# Altium PCB mcb.PcbDoc (part 2 of 2)
Units mm, origin at the board's own origin, x right, y up, seen from the top; angles counter-clockwise.
Board outline 144 x 86 mm, 4 copper layers (Top Layer, GND Plane, PWR Plane, Bottom Layer), stack 1.537 mm thick; 157 components, 137 nets, 622 pads, 241 vias.
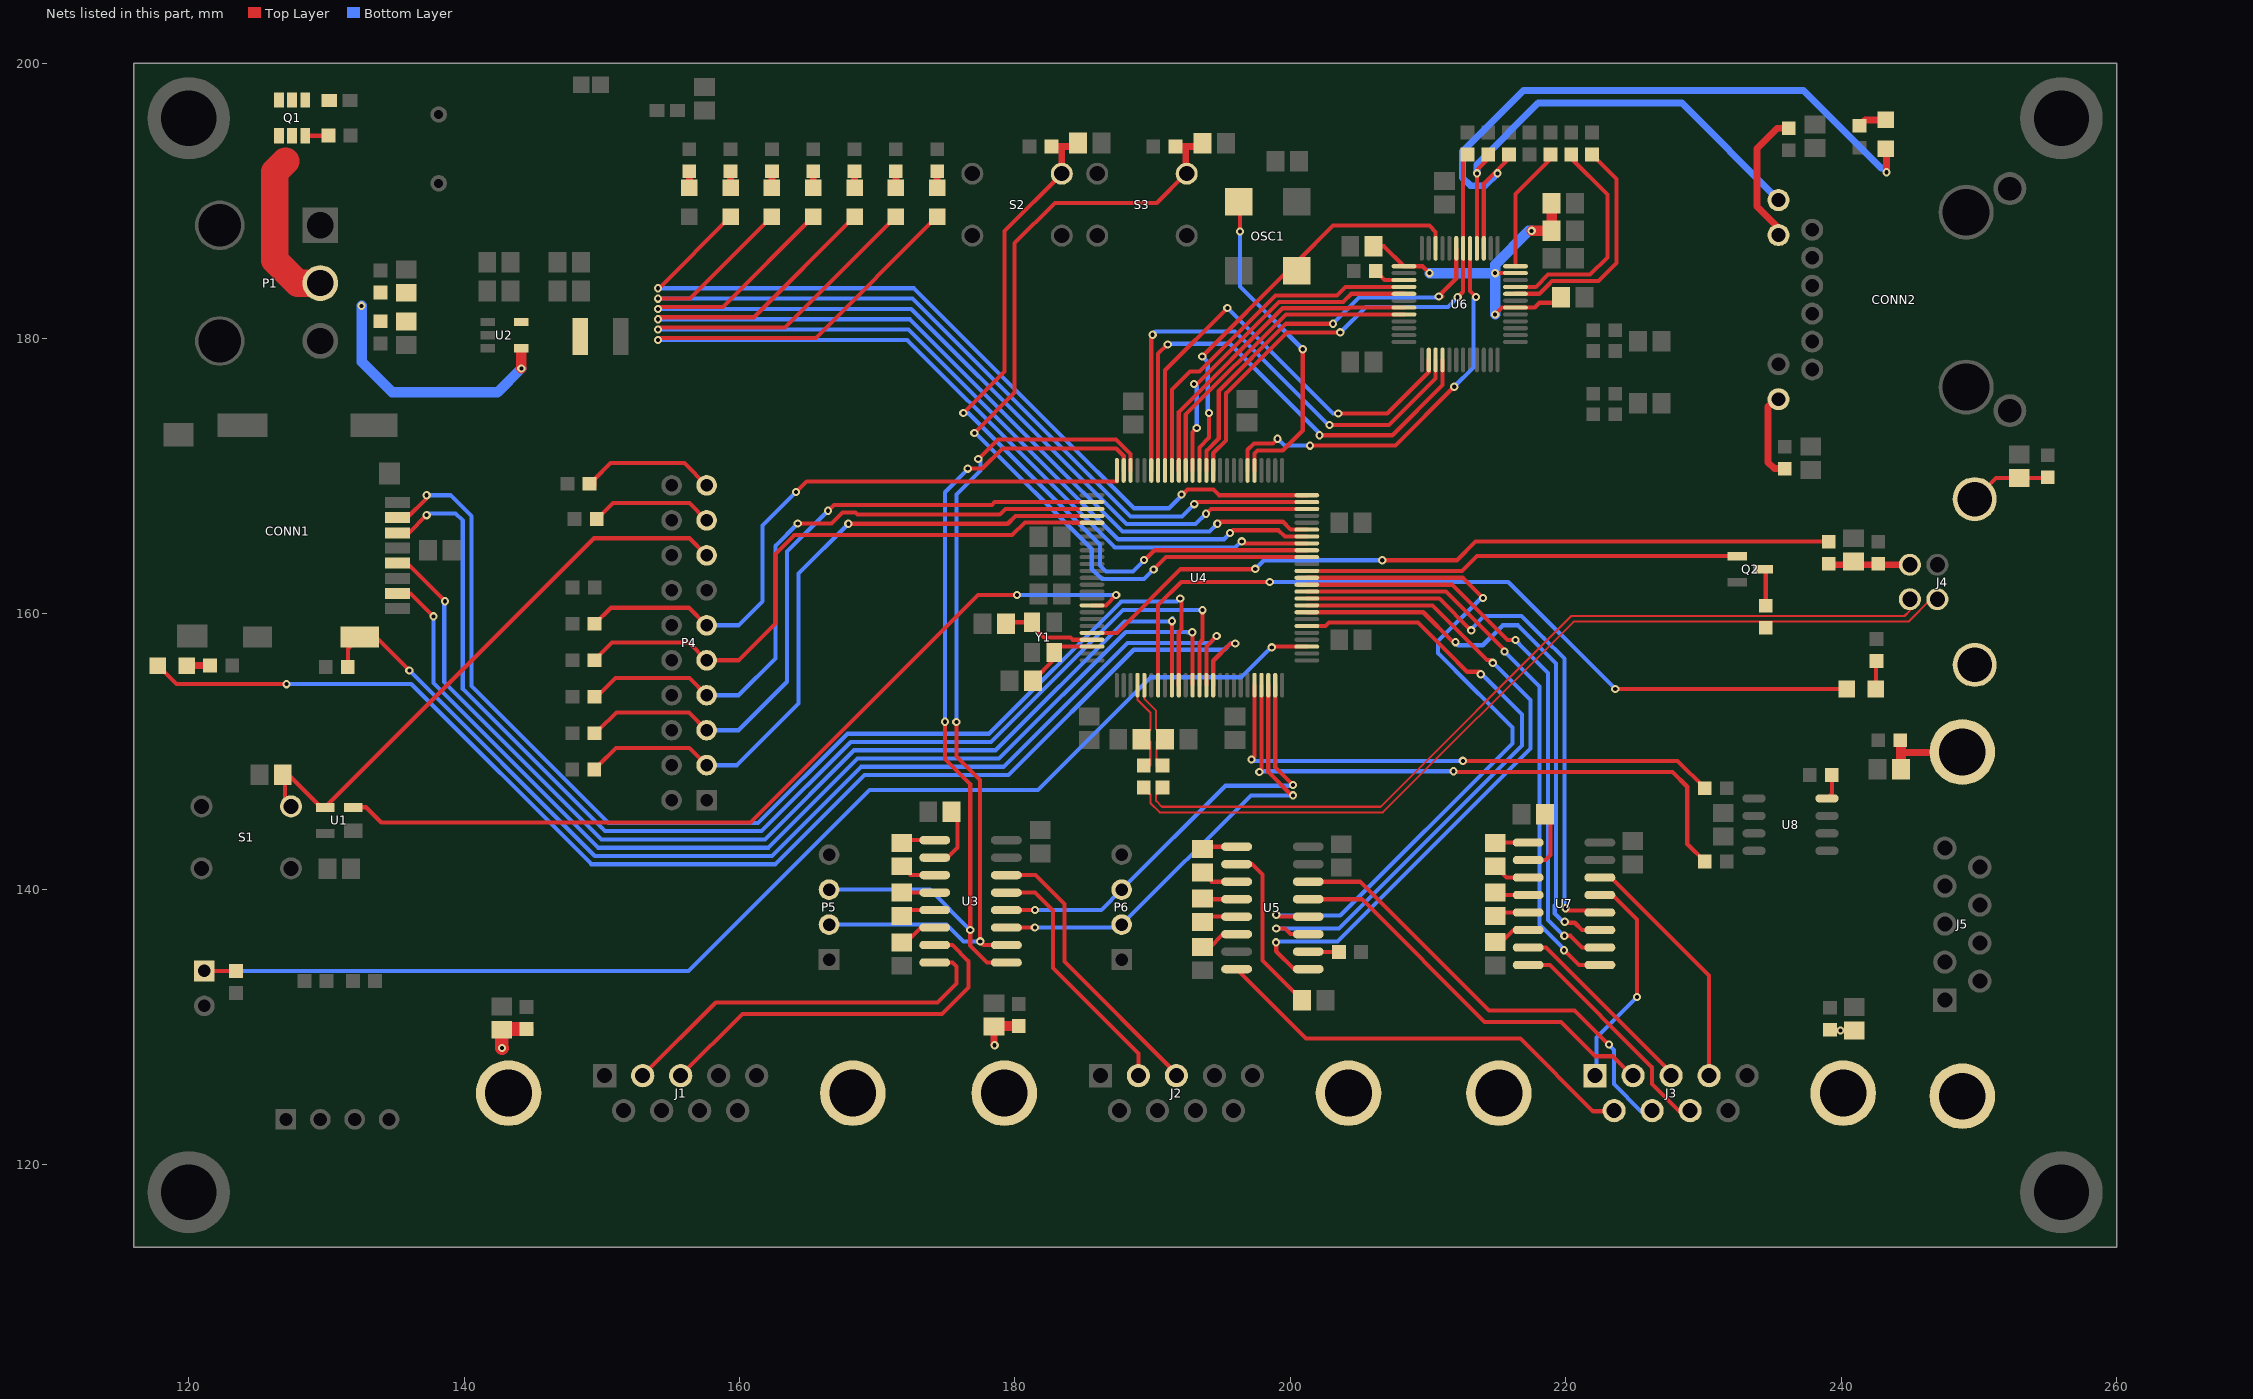
[diagram p4: the nets of this part, all layers, seen from the top]

## Via types
v1: diameter 0.6, hole 0.3, Top Layer to Bottom Layer, 146 vias
v2: diameter 0.6, hole 0.3, Top Layer to Bottom Layer, tented top, 95 vias

## Nets (pads, with @x,y where several pads share a name; then routed paths per layer and width w, separated by ;. In a path a pad name is that pad's centre, name@x,y a point inside that pad or via, vN(x,y) a via of type N, cw(c..) or ccw(c..) an arc to the next point about the centre after c; other vN are vias at no path point) (continued)
JTAG1: P4.5 R11.1 U4.2 | length 49.6
  Top Layer w0.3: R11.1@149.46,151.565 149.765,151.565 151.05,152.85 156.315,152.85 P4.5@157.61,151.555 ; v1(166.419,167.494) 166.85,167.925 178.325,167.925 178.525,168.125 U4.2@185.6,168.125
  Bottom Layer w0.3: P4.5@157.61,151.555 159.93,151.555 163.45,155.075 163.45,164.525 v1(166.419,167.494)
JTAG2: P4.7 R12.1 U4.3 | length 47.7
  Top Layer w0.3: R12.1@149.46,154.105 149.755,154.105 151,155.35 156.355,155.35 P4.7@157.61,154.095 ; v1(164.225,166.575) 166.675,166.575 167.475,167.375 168.425,167.375 168.575,167.225 178.9,167.225 179.3,167.625 U4.3@185.6,167.625
  Bottom Layer w0.3: P4.7@157.61,154.095 159.93,154.095 162.6,156.765 162.6,164.95 v1(164.225,166.575)
JTAG3: P4.3 R10.1 U4.4 | length 50.2
  Top Layer w0.3: R10.1@149.46,149.025 149.775,149.025 151.025,150.275 156.35,150.275 P4.3@157.61,149.015 ; v1(167.9,166.55) 179.475,166.55 180.05,167.125 U4.4@185.6,167.125
  Bottom Layer w0.3: P4.3@157.61,149.015 159.815,149.015 164.285,153.485 164.285,162.935 v1(167.9,166.55)
JTAG4: P4.9 R13.1 U4.5 | length 44.3
  Top Layer w0.3: R13.1@149.46,156.645 150.74,157.925 156.32,157.925 P4.9@157.61,156.635 159.93,156.635 162.6,159.305 162.6,164.35 163.975,165.725 179.8,165.725 180.725,166.65 184.174,166.65 184.199,166.625 U4.5@185.6,166.625
JTAG5: P4.11 R14.2 U4.100 | length 47.4
  Top Layer w0.3: R14.2@149.46,159.185 149.46,159.26 150.65,160.45 156.335,160.45 P4.11@157.61,159.175 ; v1(164.1,168.85) 164.875,169.625 187.4,169.625 U4.100@187.4,170.425
  Bottom Layer w0.3: P4.11@157.61,159.175 159.93,159.175 161.675,160.92 161.675,166.425 v1(164.1,168.85)
L\I\N\K\_\L\E\D\: CONN2.7 R34.1 U6.28 | length 34.3
  Top Layer w0.3: U6.28@213.55,186.55 213.55,192.25 214.375,193.075 R34.1@214.375,193.375
  Bottom Layer w0.5: v1(213.55,192) 213.55,192.65 218,197.1 228.43,197.1 CONN2.7@235.35,190.18
NetC1_2: C1.2 P4.15 S1.3 U1.3 | length 42.1
  Top Layer w0.3: C1.2@126.825,148.325 127.225,148.325 129.59,145.96 U1.3@129.9,145.96 149.44,165.5 156.365,165.5 P4.15@157.61,164.255 ; S1.3@126.975,146.025 C1.2@126.975,147.775
NetC5_2: C5.2 C6.1 R7.2 R8.1 U2.4 | length 18.7
  Top Layer w0.75: v1(144.15,177.825) U2.4@144.15,179.2
  Bottom Layer w0.75: v2(132.55,182.375) 132.55,178.325 134.775,176.1 142.425,176.1 v1(144.15,177.825)
NetC9_1: C9.1 J1.10 J1.11 R9.2 | length 3.1
  Top Layer w1: C9.1@142.727,129.802 142.727,128.492 142.744,128.475 v1(142.75,128.475) ; C9.1@142.777,129.852 R9.2@144.527,129.852
NetC13_2: C13.2 U3.6 | length 2.8
  Top Layer w0.3: C13.2@171.773,136.152 172.102,136.152 173.172,137.222 U3.6@174.173,137.222
NetC14_1: C14.1 U3.5 | length 2.6
  Top Layer w0.3: C14.1@171.773,138.077 172.188,138.492 U3.5@174.173,138.492
NetC14_2: C14.2 U3.4 | length 2.4
  Top Layer w0.3: C14.2@171.773,139.777 171.788,139.762 U3.4@174.173,139.762
NetC15_1: C15.1 U3.3 | length 2.7
  Top Layer w0.3: C15.1@171.773,141.677 172.418,141.032 U3.3@174.173,141.032
NetC15_2: C15.2 U3.1 | length 2.2
  Top Layer w0.3: C15.2@171.968,143.572 U3.1@174.173,143.572
NetC16_2: C16.2 U3.2 | length 4
  Top Layer w0.3: U3.2@174.173,142.302 175.102,142.302 175.825,143.025 C16.2@175.825,145.025
NetC17_1: C17.1 U4.22 Y1.1 | length 6.7
  Top Layer w0.3: C17.1@179.35,159.4 Y1.1@181.25,159.4 ; Y1.1@181.25,159.175 182.125,158.3 184.025,158.3 184.2,158.125 U4.22@185.6,158.125
NetC21_1: C21.1 J2.10 J2.11 R26.2 | length 3.1
  Top Layer w0.5: v1@178.475,128.725 C21.1@178.475,130.025
  Top Layer w0.75: C21.1@178.525,130.075 R26.2@180.275,130.075
  other v1: 178.525,128.675
NetC22_1: C22.1 U4.23 Y1.2 | length 5
  Top Layer w0.3: C22.1@181.3,155.15 182.85,156.7 Y1.2@182.85,157.2 ; Y1.2@183.275,157.625 U4.23@185.6,157.625
NetC25_2: C25.2 R25.1 S2.3 U4.67 | length 55.9
  Top Layer w0.3: v1(176.25,174.6) 179.25,177.6 179.25,187.8 183.4,191.95 183.4,191.75 S2.3@183.1,191.45 ; v2(189.375,163.925) 189.425,163.925 190.125,164.625 U4.67@201.2,164.625
  Top Layer w0.5: R25.1@182.65,193.95 C25.2@184.15,193.95 ; S2.3@183.4,191.95 183.4,193.95 ; C25.2@184.4,194.2 C25.2@184.575,194.2
  Bottom Layer w0.3: v1(176.25,174.6) 176.25,174.575 176.625,174.575 186.175,165.025 186.175,163.525 186.625,163.075 188.575,163.075 189.375,163.875 v2(189.375,163.925)
NetC29_2: C29.2 U5.6 | length 2.9
  Top Layer w0.3: C29.2@193.625,135.825 194.2,135.825 195.05,136.675 196.03,136.675 U5.6@196.1,136.745
NetC30_1: C30.1 U5.5 | length 2.1
  Top Layer w0.3: C30.1@194.015,138.015 U5.5@196.1,138.015
NetC30_2: C30.2 U5.4 | length 2.4
  Top Layer w0.3: C30.2@193.665,139.285 U5.4@196.1,139.285
NetC31_1: C31.1 U5.3 | length 2.8
  Top Layer w0.3: C31.1@193.625,141.225 194.295,140.555 U5.3@196.1,140.555
NetC31_2: C31.2 U5.1 | length 2.3
  Top Layer w0.3: C31.2@193.795,143.095 U5.1@196.1,143.095
NetC32_2: C32.2 R29.1 S3.3 U4.66 | length 63.9
  Top Layer w0.3: v1(177.05,173.15) 179.975,176.075 179.975,186.925 182.9,189.85 190.3,189.85 S3.3@192.4,191.95 ; v2(190.072,163.228) 190.969,164.125 U4.66@201.2,164.125
  Top Layer w0.5: R29.1@191.65,193.95 192.4,193.95 ; S3.3@192.4,191.95 192.4,193.95 ; C32.2@193.4,193.95 C32.2@193.15,193.95 ; C32.2@193.625,194.175 193.375,194.175 C32.2@193.15,193.95 ; 192.4,193.95 C32.2@193.15,193.95
  Bottom Layer w0.3: v1(177.05,173.15) 177.15,173.15 185.575,164.725 185.575,163.276 186.326,162.525 189.369,162.525 v2(190.072,163.228)
NetC36_2: C36.2 U5.2 | length 12.5
  Top Layer w0.3: U5.2@196.1,141.825 197.225,141.825 197.975,141.075 197.975,134.825 C36.2@200.85,131.95
NetC41_2: C41.2 C48.2 C49.2 C50.2 U6.18 U6.23 U6.37 | length 26.6
  Top Layer w0.3: C41.2@206.05,186.7 206.8,186.7 U6.37@208.25,185.25 209.61,185.25 v2(210.11,184.75) ; v2(214.875,181.75) 215.375,182.25 U6.18@216.35,182.25 217.75,182.25 218.1,182.6 C50.2@219.25,182.6 ; v2(214.875,184.75) U6.23@216.35,184.75
  Top Layer w0.75: v1(217.525,187.825) C48.2@218.975,187.825 C49.2@218.975,189.825
  Bottom Layer w0.75: v2(210.11,184.75) v2(214.875,184.75) ; v2(214.875,181.75) v2(214.875,184.75) ; v1(217.525,187.825) 217.325,187.825 214.875,185.375 v2(214.875,184.75)
NetC43_2: C43.2 U7.6 | length 2.8
  Top Layer w0.3: C43.2@214.875,136.175 215.35,136.175 216.22,137.045 U7.6@217.275,137.045
NetC44_1: C44.1 U7.5 | length 2.2
  Top Layer w0.3: C44.1@215.115,138.315 U7.5@217.275,138.315
NetC44_2: C44.2 U7.4 | length 2.2
  Top Layer w0.3: C44.2@215.065,139.585 U7.4@217.275,139.585
NetC45_1: C45.1 U7.3 | length 2.7
  Top Layer w0.3: C45.1@214.875,141.675 215.695,140.855 U7.3@217.275,140.855
NetC45_2: C45.2 U7.1 | length 2.4
  Top Layer w0.3: C45.2@214.895,143.395 U7.1@217.275,143.395
NetC46_2: C46.2 U7.2 | length 4.7
  Top Layer w0.3: U7.2@217.275,142.125 218.525,142.125 218.9,142.5 218.9,144.9 C46.2@218.5,145.3
NetC57_1: C57.1 J3.10 J3.11 R49.2 | length 1.7
  Top Layer w0.3: R49.2@239.25,129.75 C57.1@240.95,129.75
  other v2: 239.95,129.75
NetC58_1: C58.1 J4.1 R50.2 R54.2 | length 5.8
  Top Layer w0.5: R50.2@239.18,163.57 J4.1@244.99,163.57
NetC59_1: C59.1 J5.10 J5.11 R51.2 | length 6.7
  Top Layer w0.5: 244.35,149.932 J5.11@248.757,149.932
  Top Layer w0.75: C59.1@244.35,148.475 C59.1@244.35,148.725 244.35,149.932 R51.2@244.35,150.775
NetC60_1: C60.1 J4.5 J4.6 R55.2 | length 6
  Top Layer w0.3: J4.6@249.7,168.34 251.235,169.875 C60.1@252.925,169.875 254.95,169.875 R55.2@255,169.925
NetCONN1_2: CONN1.2 U4.35 | length 87.8
  Top Layer w0.3: CONN1.2@135.15,166.99 135.865,166.99 137.275,168.4 v1(137.275,168.625) ; U4.35@191.9,154.825 191.9,158.7 192.1,158.9 v2@192.1,161.025
  Bottom Layer w0.3: v1(137.275,168.625) 139,168.625 140.525,167.1 140.525,154.775 150.475,144.825 161.351,144.825 167.826,151.3 178.124,151.3 187.724,160.9 191.775,160.9 v2(192,161.125)
NetCONN1_3: CONN1.3 U4.38 | length 88
  Top Layer w0.3: CONN1.3@135.15,165.89 135.99,165.89 v1(137.275,167.175) ; U4.38@193.4,154.825 193.4,157.9 193.625,158.125 v2(193.625,160.275)
  Bottom Layer w0.3: v1(137.275,167.175) 137.4,167.3 139.375,167.3 139.9,166.775 139.9,154.551 150.226,144.225 161.6,144.225 168.075,150.7 178.25,150.7 180.101,152.551 187.85,160.3 193.6,160.3 v2(193.625,160.275)
NetCONN1_5: CONN1.5 U4.34 | length 79.4
  Top Layer w0.3: CONN1.5@135.15,163.69 135.835,163.69 v1(138.6,160.925) ; U4.34@191.4,154.825 v2(191.4,159.475)
  Bottom Layer w0.3: v1(138.6,160.925) 138.55,160.875 138.55,155.053 149.978,143.625 161.849,143.625 168.324,150.1 178.597,150.1 187.947,159.45 191.192,159.45 v2@191.442,159.7
NetCONN1_7: CONN1.7 U4.37 | length 78.5
  Top Layer w0.3: CONN1.7@135.15,161.49 136.11,161.49 v1(137.775,159.825) ; U4.37@192.9,154.825 v2@192.9,158.644
  Bottom Layer w0.3: v1(137.775,159.825) 137.775,154.979 149.729,143.025 162.097,143.025 168.572,149.5 178.846,149.5 188.046,158.7 192.49,158.7 192.518,158.672 v2(192.872,158.672)
NetCONN1_9: CONN1.9 R4.1 U4.39 | length 83
  Top Layer w0.3: R4.1@131.55,156.15 131.55,157.475 CONN1.9@132.4,158.325 131.85,158.325 133.581,158.325 v1(136.018,155.887) ; U4.39@193.9,154.825 193.9,157.65 v2(194.65,158.4)
  Bottom Layer w0.3: v1(136.018,155.887) 149.481,142.425 162.346,142.425 168.821,148.9 179.175,148.9 188.175,157.9 194.15,157.9 v2(194.65,158.4)
NetCONN2_8: CONN2.8 R48.1 | length 9.7
  Top Layer w0.5: CONN2.8@235.35,187.64 235.35,188.15 233.9,189.6 233.9,193.8 235.375,195.275 R48.1@236.2,195.275
NetCONN2_10: CONN2.10 R46.1 | length 6.4
  Top Layer w0.5: CONN2.10@235.35,175.72 234.7,175.07 234.7,171 235.15,170.55 R46.1@235.9,170.55
NetD1_1: D1.1 R1.1 | length 1.7
  Top Layer w0.5: D1.1@119.85,156.25 R1.1@121.55,156.25
NetD1_2: D1.2 U4.40 | length 94.8
  Top Layer w0.3: D1.2@117.75,156.25 119.1,154.9 v1(127.1,154.9) ; U4.40@194.4,154.825 194.4,156.1 194.4,156.6 195.65,157.85 v2(196,157.85)
  Bottom Layer w0.3: v1(127.1,154.9) 136.157,154.9 149.232,141.825 162.594,141.825 169.069,148.3 179.525,148.3 188.625,157.4 193.925,157.4 195.2,157.4 195.65,157.85 v2(196,157.85)
NetD2_1: D2.1 R18.1 | length 1.2
  Top Layer w0.5: D2.1@156.35,190.95 R18.1@156.35,192.15
NetD3_1: D3.1 R19.1 | length 1.2
  Top Layer w0.5: D3.1@159.35,190.95 R19.1@159.35,192.15
NetD3_2: D3.2 U4.75 | length 61.9
  Top Layer w0.3: v1(154.075,183.65) 154.15,183.65 D3.2@159.35,188.85 ; v2@192.3,168.8 192.525,169.025 194.428,169.025 194.828,168.625 U4.75@201.2,168.625
  Bottom Layer w0.3: v1(154.075,183.65) 172.668,183.65 183.246,173.071 188.643,167.675 191.175,167.675 v2@192.3,168.8
  other v2: 192.1,168.675
NetD4_1: D4.1 R20.1 | length 1.2
  Top Layer w0.5: D4.1@162.35,190.95 R20.1@162.35,192.15
NetD4_2: D4.2 U4.74 | length 64.9
  Top Layer w0.3: v1(154.075,182.9) 156.4,182.9 D4.2@162.35,188.85 ; v2(193.025,167.975) v2@193.025,168.025 ; v2@193.188,168.125 194.325,168.125 U4.74@201.2,168.125
  Bottom Layer w0.3: v1(154.075,182.9) 172.569,182.9 182.822,172.647 188.394,167.075 192.125,167.075 192.919,167.869 192.919,168.075 192.925,168.075 v2(193.025,167.975)
NetD5_1: D5.1 R21.1 | length 1.2
  Top Layer w0.5: D5.1@165.35,190.95 R21.1@165.35,192.15
NetD5_2: D5.2 U4.73 | length 68.1
  Top Layer w0.3: v1(154.075,182.15) 154.225,182.3 158.8,182.3 D5.2@165.35,188.85 ; v2(193.875,167.275) 194.225,167.625 U4.73@201.2,167.625
  Bottom Layer w0.3: v1(154.075,182.15) 172.471,182.15 182.398,172.223 188.096,166.525 193.125,166.525 v2(193.875,167.275)
NetD6_1: D6.1 R22.1 | length 1.2
  Top Layer w0.5: D6.1@168.35,190.95 R22.1@168.35,192.15
NetD6_2: D6.2 U4.70 | length 71.2
  Top Layer w0.3: v1(154.075,181.4) 154.225,181.55 161.05,181.55 D6.2@168.35,188.85 ; v2@194.825,166.7 199.45,166.7 200.025,166.125 U4.70@201.2,166.125
  Bottom Layer w0.3: v1(154.075,181.4) 172.372,181.4 181.974,171.799 187.797,165.975 194.125,165.975 v2(194.7,166.55)
NetD7_1: D7.1 R23.1 | length 1.2
  Top Layer w0.5: D7.1@171.35,190.95 R23.1@171.35,192.15
NetD7_2: D7.2 U4.69 | length 74.6
  Top Layer w0.3: v1(154.075,180.65) 154.225,180.8 163.3,180.8 D7.2@171.35,188.85 ; v2(195.625,165.875) 195.825,166.075 199.15,166.075 199.6,165.625 U4.69@201.2,165.625
  Bottom Layer w0.3: v1(154.075,180.65) 172.274,180.65 181.549,171.374 187.499,165.425 195.175,165.425 v2(195.625,165.875)
NetD8_1: D8.1 R24.1 | length 1.2
  Top Layer w0.5: D8.1@174.35,190.95 R24.1@174.35,192.15
NetD8_2: D8.2 U4.68 | length 77.7
  Top Layer w0.3: v1(154.075,179.9) 154.225,180.05 165.55,180.05 D8.2@174.35,188.85 ; U4.68@201.2,165.125 198.9,165.125 196.667,165.125 v2(196.475,165.275) ; v2(196.475,165.275) 196.475,165.308 v2(196.475,165.275)
  Bottom Layer w0.3: v1(154.075,179.9) 172.175,179.9 181.125,170.95 187.25,164.825 195.992,164.825 196.442,165.275 v2(196.475,165.275)
NetD9_1: D9.1 R53.1 | length 2
  Top Layer w0.3: D9.1@242.525,154.55 R53.1@242.525,156.525
NetD9_2: D9.2 U4.32 | length 59.8
  Top Layer w0.3: U4.32@190.4,154.825 190.4,160.65 192.075,162.325 v2(198.5,162.325) ; v2(223.6,154.55) D9.2@240.425,154.55
  Bottom Layer w0.3: v2(198.5,162.325) 215.825,162.325 v2(223.6,154.55)
NetD10_1: D10.1 R52.1 | length 2.1
  Top Layer w0.5: R52.1@241.325,195.45 241.75,195.875 D10.1@243.25,195.875
NetD10_2: D10.2 R33.1 U6.27 | length 49.7
  Top Layer w0.3: U6.27@214.05,186.55 214.05,191.25 215.875,193.075 R33.1@215.875,193.375
  Top Layer w0.5: D10.2@243.25,193.775 243.3,193.725 v1(243.3,192.075)
  Bottom Layer w0.5: v1(215.05,192) 214.15,191.1 213.075,191.1 212.5,191.675 212.5,193.6 216.925,198.025 237.275,198.025 242.9,192.4 243.3,192.4 v1(243.3,192.075)
NetJ1_2: J1.2 U3.8 | length 28.5
  Top Layer w0.3: J1.2@152.965,126.47 158.27,131.775 174.375,131.775 175.75,133.15 175.75,134.39 175.458,134.682 U3.8@174.173,134.682
NetJ1_3: J1.3 U3.7 | length 27.4
  Top Layer w0.3: J1.3@155.725,126.47 160.205,130.95 174.7,130.95 176.625,132.875 176.625,134.775 175.45,135.95 U3.7@175.175,135.95
NetJ2_2: J2.2 U3.13 | length 18.5
  Top Layer w0.3: U3.13@179.373,139.762 181.463,139.762 182.775,138.45 182.775,134.275 188.965,128.085 J2.2@188.965,126.445
NetJ2_3: J2.3 U3.14 | length 20.9
  Top Layer w0.3: U3.14@179.373,141.032 181.493,141.032 183.589,138.936 183.589,134.761 J2.3@191.815,126.535
NetJ3_1: J3.1 U7.13 | length 16
  Top Layer w0.3: U7.13@222.475,139.585 223.39,139.585 225.175,137.8 v1(225.175,132.175)
  Bottom Layer w0.3: J3.1@222.235,126.42 222.235,129.235 v1(225.175,132.175)
NetJ3_2: J3.2 U5.13 | length 28.9
  Top Layer w0.3: U5.13@201.3,139.285 205.19,139.285 214.1,130.375 219.65,130.375 222.15,127.875 223.435,127.875 J3.2@224.89,126.42
NetJ3_3: J3.3 U7.7 | length 14.3
  Top Layer w0.3: U7.7@217.275,135.775 218.561,135.775 J3.3@227.783,126.553
NetJ3_4: J3.4 U7.14 | length 17.4
  Top Layer w0.3: U7.14@223.295,140.855 230.41,133.74 J3.4@230.41,126.42
NetJ3_6: J3.6 U5.8 | length 31.7
  Top Layer w0.3: U5.8@196.1,134.205 201.13,129.175 216.7,129.175 221.995,123.88 J3.6@223.51,123.88
NetJ3_7: J3.7 U5.14 | length 32.7
  Top Layer w0.3: U5.14@201.3,140.555 205.07,140.555 214.425,131.2 220.625,131.2 223.1,128.725 v1(223.15,128.725)
  Bottom Layer w0.3: v1(223.15,128.725) 223.15,128.675 223.5,128.325 223.5,125.85 225.47,123.88 J3.7@225.595,123.88
NetJ3_8: J3.8 U7.8 | length 16.1
  Top Layer w0.3: U7.8@217.275,134.505 218.845,134.505 226.275,127.075 226.275,125.875 J3.8@228.27,123.88
NetL1_1: L1.1 Q1.4
NetL2_1: L2.1 U2.5
NetOSC1_1: OSC1.1 U4.80 | length 23.5
  Top Layer w0.3: v2(196.35,187.775) OSC1.1@196.35,189.475 ; U4.80@197.4,170.425 197.4,171.664 197.611,171.875 199.45,171.875 200.9,173.325 v1(200.9,179.225)
  Bottom Layer w0.3: v2(196.35,187.775) 196.35,183.775 v1(200.9,179.225)
NetP1_2: P1.2 Q1.1 Q1.2 Q1.5 Q1.6 | length 11.5
  Top Layer w2: 127.025,192.875 126.25,192.1 126.25,185.675 127.9,184.025 P1.2@129.55,184.025
NetP2_1: P2.1 R2.1 U4.53 | length 92.1
  Top Layer w0.3: P2.1@121.125,134.075 R2.1@123.425,134.075 ; v2@198.65,157.625 U4.53@201.2,157.625
  Bottom Layer w0.3: P2.1@121.125,134.075 156.3,134.075 169.45,147.225 170.3,147.225 181.675,147.225 189.85,155.4 196.425,155.4 198.6,157.575 v2(198.65,157.575)
NetP4_17: P4.17 R16.2 | length 9.2
  Top Layer w0.3: R16.2@149.46,166.8 149.55,166.8 150.8,168.05 156.355,168.05 P4.17@157.61,166.795
NetP4_19: P4.19 R17.2 | length 9.8
  Top Layer w0.3: R17.2@149.46,169.325 149.46,169.785 150.625,170.95 155.995,170.95 P4.19@157.61,169.335
NetQ1_3: Q1.3 R5.2 | length 1.7
  Top Layer w0.3: Q1.3@128.45,194.725 130.125,194.725 R5.2@130.15,194.75
NetQ2_1: Q2.1 R45.2 | length 2.5
  Top Layer w0.3: R45.2@234.525,160.6 Q2.1@234.525,163.075
NetQ2_2: Q2.2 U4.64 | length 31.7
  Top Layer w0.3: U4.64@201.2,163.125 212.475,163.125 213.55,164.2 Q2.2@232.45,164.2
NetR30_1: R30.1 U5.10 | length 2.2
  Top Layer w0.3: U5.10@201.325,135.45 R30.1@203.525,135.45
NetR31_1: R31.1 U6.39 | length 2.3
  Top Layer w0.3: R31.1@206.2,184.9 206.85,184.25 U6.39@208.25,184.25
NetR40_2: R40.2 U6.24 | length 9.2
  Top Layer w0.3: U6.24@216.35,185.25 216.35,190.5 218.9,193.05 R40.2@218.9,193.375
NetR41_1: R41.1 U6.21 | length 16.1
  Top Layer w0.3: U6.21@216.35,183.75 217.825,183.75 218.725,184.65 221.775,184.65 223.025,185.9 223.025,190.45 220.4,193.075 R41.1@220.4,193.375
NetR42_1: R42.1 U6.20 | length 16.9
  Top Layer w0.3: U6.20@216.35,183.25 218.076,183.25 218.7,183.874 219.001,184.175 222.375,184.175 223.7,185.5 223.7,191.575 R42.1@221.9,193.375
NetR43_2: R43.2 U4.47 | length 43.9
  Top Layer w0.3: v1(197.75,148.525) 197.9,148.675 U4.47@197.9,154.825 ; v1@211.825,148.625 211.825,148.6 v1(211.85,148.575) ; v1@211.85,148.525 227.75,148.525 228.825,147.45 228.825,143.3 R43.2@230.1,142.025
  Bottom Layer w0.3: v1(197.75,148.525) 197.8,148.575 v1(211.85,148.575)
NetR44_2: R44.2 U4.46 | length 39.4
  Top Layer w0.3: v1@197.2,149.4 v1(197.175,149.425) 197.4,149.65 U4.46@197.4,154.825 ; v1(212.53,149.33) 212.636,149.225 212.736,149.325 228.125,149.325 R44.2@230.1,147.35
  Bottom Layer w0.3: v1(197.175,149.425) v1@197.275,149.325 ; v1@197.305,149.33 v1(212.53,149.33)
NetR47_2: R47.2 U8.8 | length 1.8
  Top Layer w0.3: U8.8@238.975,146.605 239.325,146.955 R47.2@239.325,148.3
NetR50_1: R50.1 U4.21 | length 56.2
  Top Layer w0.3: U4.21@185.6,158.625 187.4,158.625 192.025,163.25 197.425,163.25 v2(197.45,163.275) ; v1(206.675,163.9) 212.1,163.9 213.45,165.25 R50.1@239.1,165.25
  Bottom Layer w0.3: v2(197.45,163.275) 198.075,163.9 v1(206.675,163.9)
NetU1_2: U1.2 U4.17 | length 64.8
  Top Layer w0.3: U1.2@131.95,145.96 132.865,145.96 133.975,144.85 160.8,144.85 177.325,161.375 v1(180.15,161.375) ; U4.17@185.6,160.625 186.6,160.625 v2(187.35,161.375)
  Bottom Layer w0.3: v1(180.15,161.375) v2(187.35,161.375)
NetU4_81: U4.81 U6.29 | length 29.8
  Top Layer w0.3: U4.81@196.9,170.425 196.9,171.925 197.35,172.375 198.725,172.375 v1(199.075,172.725) ; v1(201.425,172.225) 207.625,172.225 v1(211.9,176.5) ; U6.29@213.05,186.55 213.05,183.45 v2(213.475,183.025)
  Bottom Layer w0.3: v1(199.075,172.725) 199.575,172.225 v1(201.425,172.225) ; v1(211.9,176.5) 213.3,177.9 213.3,183 213.325,183.025 v2(213.475,183.025)
PHY_CRS_DV: U4.92 U6.40 | length 25.8
  Top Layer w0.3: U4.92@191.4,170.425 191.4,176.3 192.7,177.6 193.4,177.6 198.925,183.125 203.375,183.125 204,183.75 U6.40@208.25,183.75
PHY_MDC: U4.87 U6.31 | length 29.4
  Top Layer w0.3: U4.87@193.9,170.425 193.9,171.85 194.8,172.75 194.8,176.2 199.68,181.08 v1(203.095,181.08) ; v2(210.775,183.05) 211.05,183.05 210.887,183.212 212.05,184.375 U6.31@212.05,186.55
  Bottom Layer w0.3: v1(203.095,181.08) 204.995,182.981 210.844,182.981 v2(210.775,183.05)
PHY_MDIO: R32.1 U4.86 U6.30 | length 36.1
  Top Layer w0.3: U4.86@194.4,170.425 194.4,171.675 195.325,172.6 195.325,176.025 199.75,180.45 v1(203.625,180.45) v1@203.595,180.48 ; v2(212.15,183) 212.55,183.4 U6.30@212.55,186.55 R32.1@212.55,193.05
  Bottom Layer w0.3: v1@203.625,180.55 v1(203.625,180.45) 205.481,182.306 211.442,182.306 212.136,183 v2(212.15,183)
PHY_RX_ER: U4.89 U6.41 | length 24.5
  Top Layer w0.3: U4.89@192.9,170.425 192.9,173.2 v1(193.2,173.5) ; v1@193.112,176.587 199.187,182.662 203.837,182.662 204.425,183.25 U6.41@208.25,183.25
  Bottom Layer w0.3: v1(193,176.7) v1@193.2,176.7 ; v1(193.2,173.5) v1@193.2,176.699
PHY_RXD0: U4.91 U6.43 | length 23.7
  Top Layer w0.3: U4.91@191.9,170.425 191.9,174.675 199.425,182.2 204.264,182.2 204.314,182.25 U6.43@208.25,182.25
PHY_RXD1: U4.90 U6.44 | length 22.9
  Top Layer w0.3: U4.90@192.4,170.425 192.4,174.475 199.675,181.75 204.75,181.75 U6.44@208.25,181.75
PHY_TX_EN: U4.93 U6.2 | length 33.6
  Top Layer w0.3: U4.93@190.9,170.425 190.9,177.7 v1(195.425,182.225) ; v1(203.475,174.55) 207.036,174.55 210.05,177.564 U6.2@210.05,178.45
  Bottom Layer w0.3: v1(195.425,182.225) 203.1,174.55 v1(203.475,174.55)
PHY_TXD0: U4.95 U6.3 | length 36.1
  Top Layer w0.3: U4.95@189.9,170.425 v1@189.9,180.2 ; v1(202.85,173.725) 207.175,173.725 210.55,177.1 U6.3@210.55,178.45
  Bottom Layer w0.3: v1(190,180.275) 190,180.325 190.2,180.525 195.975,180.525 202.655,173.845 202.655,173.82 202.775,173.7 202.825,173.7 v1(202.85,173.725)
PHY_TXD1: U4.94 U6.4 | length 35.7
  Top Layer w0.3: U4.94@190.4,170.425 190.4,178.9 191.075,179.575 191.09,179.575 v1(191.095,179.57) ; v1@202.195,172.905 v1(202.125,172.975) 207.4,172.975 211.05,176.625 U6.4@211.05,178.45
  Bottom Layer w0.3: v1@191.095,179.625 195.624,179.625 198.749,176.5 202.125,173.124 v1(202.125,172.975)
REF_CLK: OSC1.3 U4.88 U6.34 | length 30.9
  Top Layer w0.3: U4.88@193.4,170.425 193.4,172.1 194.1,172.8 v1(194.1,174.6) ; v1(193.6,178.7) OSC1.3@200.125,185.225 ; OSC1.3@200.5,185.375 200.5,185.6 203.1,188.2 210.1,188.2 210.55,187.75 U6.34@210.55,186.55
  Bottom Layer w0.3: v1(193.6,178.7) 194,178.3 194,174.5 v1(194.1,174.6)
UART0_RXD: P5.3 U3.9 U4.99 | length 63.9
  Top Layer w0.3: v1(174.925,152.175) 174.925,149.475 176.75,147.65 176.75,135.91 177.978,134.682 U3.9@179.373,134.682 ; v1(176.575,170.55) 177.625,170.55 179.1,172.025 187.358,172.025 187.9,171.483 U4.99@187.9,170.425
  Bottom Layer w0.3: P5.3@166.5,139.98 173.82,139.98 v2(176.75,137.05) ; v1(174.925,152.175) 174.925,168.84 v1@176.605,170.52 ; v1(176.575,170.55) v1@176.605,170.52
UART0_TXD: P5.2 U3.10 U4.98 | length 63.4
  Top Layer w0.3: v1(175.745,152.15) 175.745,149.645 177.45,147.94 177.45,136.2 177.698,135.952 U3.10@179.373,135.952 ; v1(177.33,171.255) 177.34,171.255 178.765,172.68 187.34,172.68 188.4,171.62 U4.98@188.4,170.425
  Bottom Layer w0.3: P5.2@166.5,137.44 175.035,137.44 176.25,136.225 v2(177.475,136.225) ; v1(175.745,152.15) 175.745,168.67 177.5,170.425 177.5,171.086 v1(177.33,171.255)
UART1_CTS: U4.61 U7.9 | length 42.7
  Top Layer w0.3: U4.61@201.2,161.625 211.308,161.625 215.55,157.383 v2(215.55,157.275) ; v2(219.875,135.575) 219.875,135.65 v2@219.9,135.675 ; v2@220.016,135.459 220.97,134.505 U7.9@222.475,134.505
  Bottom Layer w0.3: v2(215.55,157.275) 215.775,157.05 217.102,155.723 218.1,154.725 218.1,143.09 218.1,137.435 219.875,135.66 v2(219.875,135.575)
UART1_DCD: U4.60 U7.12 | length 42
  Top Layer w0.3: U4.60@201.2,161.125 210.818,161.125 v1(213.135,158.808) ; v2@219.925,138.575 v2(219.975,138.625) ; v2@220.1,138.45 222.34,138.45 U7.12@222.475,138.315
  Bottom Layer w0.3: v1@213.148,158.923 214.075,159.85 216.8,159.85 218.362,158.288 219.9,156.75 219.9,144.225 219.9,138.7 v2(219.975,138.625)
UART1_DSR: U4.59 U5.9 | length 50.6
  Top Layer w0.3: v2(198.95,136.15) 198.975,136.175 198.975,135.5 200.27,134.205 U5.9@201.3,134.205 ; U4.59@201.2,160.625 202.26,160.625 210.315,160.625 214.29,156.65 214.547,156.65 214.7,156.497 v2(214.7,156.45)
  Bottom Layer w0.3: v2(198.95,136.15) 198.95,136.175 198.975,136.2 203.422,136.2 217.45,150.228 217.45,153.747 214.747,156.45 v2(214.7,156.45)
UART1_DTR: U4.58 U7.11 | length 42.9
  Top Layer w0.3: U4.58@201.2,160.125 209.65,160.125 211.825,157.95 v1(212,157.95) ; v2(219.925,137.65) 220,137.575 220.656,137.575 221.186,137.045 U7.11@222.475,137.045
  Bottom Layer w0.3: v1@212,157.9 212.175,157.725 213.975,157.725 215.425,159.175 216.525,159.175 217.225,158.475 219.3,156.4 219.3,155.726 219.3,144.324 219.3,138.915 219.2,138.815 219.2,138.235 219.86,137.575 219.9,137.575 219.925,137.6 v2(219.925,137.65)
UART1_RTS: U4.56 U5.11 | length 46.6
  Top Layer w0.3: v2(198.975,137.15) 199.605,137.15 200.01,136.745 U5.11@201.3,136.745 ; U4.56@201.2,159.125 202.55,159.125 202.8,159.375 209.275,159.375 211.367,157.283 212.85,155.8 213.403,155.8 213.725,155.8 213.825,155.7 v1(213.825,155.625)
  Bottom Layer w0.3: v2(198.975,137.15) 203.524,137.15 216.825,150.451 216.825,152.7 213.9,155.625 v1(213.825,155.625)
UART1_RXD: U4.63 U5.12 | length 52.4
  Top Layer w0.3: v2(198.975,138.15) 198.975,138.1 199.06,138.015 U5.12@201.3,138.015 ; U4.63@201.2,162.625 212.525,162.625 v1(213.988,161.162)
  Bottom Layer w0.3: v2(198.975,138.15) 199.025,138.1 203.625,138.1 216.125,150.6 216.125,151.75 214.237,153.638 213.175,154.7 210.725,157.15 210.725,158.025 213.862,161.162 v1(213.988,161.162)
UART1_TXD: U4.62 U7.10 | length 42.6
  Top Layer w0.3: U4.62@201.2,162.125 211.744,162.125 215.769,158.1 v2(216.35,158.1) ; v2(219.9,136.625) 220.336,136.625 221.186,135.775 U7.10@222.475,135.775
  Bottom Layer w0.3: v2@216.4,158.025 216.55,157.875 216.75,157.675 218.7,155.725 218.7,154.128 218.7,143.415 218.7,137.785 219.86,136.625 v2(219.9,136.625)
UART2_RXD: P6.3 U3.12 U4.49 | length 32.4
  Top Layer w0.3: U3.12@179.373,138.492 181.442,138.492 v1(181.45,138.5) ; U4.49@198.9,154.825 198.9,148.875 v1(200.2,147.575)
  Bottom Layer w0.3: v1(181.45,138.5) 186.27,138.5 P6.3@187.75,139.98 195.295,147.525 200.15,147.525 v1(200.2,147.575)
UART2_TXD: P6.2 U3.11 U4.48 | length 33.6
  Top Layer w0.3: U3.11@179.373,137.222 v1(181.447,137.222) ; U4.48@198.4,154.825 198.4,153.758 198.4,148.526 200.101,146.825 v1(200.2,146.825)
  Bottom Layer w0.3: v1(181.447,137.222) 187.532,137.222 P6.2@187.75,137.44 197.135,146.825 v1(200.2,146.825)
USB_C_N: J4.2 R28.2 | length 62.8
  Top Layer w0.15: R28.2@190.8,147.4 190.25,146.85 190.25,146.421 190.671,146 206.554,146 220.404,159.85 227.15,159.85 241.075,159.85 244.6,159.85 244.99,160.24 J4.2@244.99,161.07
USB_C_P: J4.3 R27.2 R45.1 | length 65.2
  Top Layer w0.15: R27.2@189.3,147.4 189.846,146.854 189.846,146.254 190.504,145.596 206.721,145.596 220.571,159.446 227.15,159.446 241.429,159.446 244.896,159.446 246.52,161.07 J4.3@246.99,161.07
USB_H_N: C28.1 R28.1 U4.30 | length 6.3
  Top Layer w0.15: U4.30@189.4,154.825 189.4,153.832 190.25,152.982 190.25,151.6 C28.1@190.95,150.9 ; R28.1@190.275,148.975 C28.1@190.275,150.725
USB_H_P: C26.1 R27.1 U4.29 | length 6.4
  Top Layer w0.15: U4.29@188.9,154.825 188.9,153.761 189.846,152.815 189.846,151.596 C26.1@189.15,150.9 ; R27.1@189.825,149 C26.1@189.825,150.75
pads on no net: CONN1. CONN1.1 CONN1.8 J1.1 J1.4 J1.6 J1.7 J1.8 J1.9 J2.1 J2.4 J2.6 J2.7 J2.8 J2.9 J3.9 J5.3 J5.4 J5.5 J5.8 P1. P1.3 S1.2 S1.4 S2.2 S2.4 S3.2 S3.4 U4.6 U4.7 U4.8 U4.9 U4.13 U4.14 U4.16 U4.18 U4.20 U4.26 U4.27 U4.33 U4.36 U4.43 U4.44 U4.45 U4.50 U4.51 U4.52 U4.57 U4.65 U4.76 U4.77 U4.78 U4.79 U4.82 U4.85 U5.7 U6.1 U6.5 U6.6 U6.7 U6.8 U6.9 U6.10 U6.11 U6.12 U6.25 U6.33 U6.38 U6.42 U6.45 U6.46 U8.5 Y1.3 Y1.4
copper on no net: | length 460
  Top Layer w0.15: 116,114 260,114 260,200 116,200 116,114

## Polygon pours and split planes (outlines as drawn)
GND on GND Plane (split plane): 275 vertices, not listed, extent 116.502,114.502 259.498,199.498
GND on GND Plane (split plane): 141.973,188.25 141.981,188.185 142.007,188.124 142.047,188.072 142.099,188.032 142.16,188.006 142.225,187.998 152.673,187.998 152.673,175.577 116.502,175.577 116.502,199.498 141.973,199.498
NetC9_1 on GND Plane (split plane): 146.975,128.869 146.975,122.602 146.983,122.537 146.994,122.511 147.009,122.476 147.018,122.464 147.049,122.424 149.549,119.924 149.561,119.914 149.601,119.884 149.626,119.873 149.662,119.858 149.718,119.851 149.727,119.85 162.227,119.85 162.292,119.858 162.353,119.884 162.405,119.924 164.905,122.424 164.928,122.453 164.945,122.476 164.953,122.494 164.97,122.537 164.979,122.602 164.979,126.672 166.604,128.298 169.771,128.298 171.475,126.594 171.475,114.502 139.979,114.502 139.979,128.922 141.479,130.423 145.421,130.423
NetC21_1 on GND Plane (split plane): 182.948,128.671 182.948,122.6 182.956,122.535 182.982,122.474 183.022,122.422 185.522,119.922 185.574,119.882 185.635,119.856 185.7,119.848 198.2,119.848 198.265,119.856 198.29,119.867 198.326,119.882 198.338,119.891 198.378,119.922 200.878,122.422 200.888,122.434 200.918,122.474 200.929,122.499 200.944,122.535 200.951,122.591 200.952,122.6 200.952,126.521 202.654,128.223 205.771,128.223 207.448,126.546 207.448,114.502 175.952,114.502 175.952,129.046 177.529,130.623 180.996,130.623
NetC57_1 on GND Plane (split plane): 243.423,128.796 243.423,114.502 211.877,114.502 211.877,126.271 213.779,128.173 216.421,128.173 219.098,125.496 219.098,122.525 219.106,122.46 219.132,122.399 219.172,122.347 222.247,119.272 222.299,119.232 222.36,119.206 222.425,119.198 233.225,119.198 233.29,119.206 233.351,119.232 233.403,119.272 236.303,122.172 236.343,122.224 236.369,122.285 236.377,122.35 236.377,128.221 238.479,130.323 241.896,130.323
NetC59_1 on GND Plane (split plane): 259.498,121.852 247.854,121.852 246.202,123.504 246.202,126.546 248.204,128.548 252.5,128.548 252.509,128.549 252.565,128.556 252.601,128.571 252.626,128.582 252.649,128.599 252.678,128.622 255.678,131.622 255.696,131.644 255.718,131.674 255.736,131.717 255.744,131.735 255.752,131.8 255.752,142.8 255.744,142.865 255.736,142.883 255.718,142.926 255.696,142.956 255.678,142.978 252.678,145.978 252.649,146.001 252.626,146.018 252.601,146.029 252.565,146.044 252.509,146.051 252.5,146.052 245.179,146.052 243.752,147.479 243.752,151.821 244.979,153.048 259.498,153.048
GND on GND Plane (split plane): 254.222,192.097 254.274,192.057 254.306,192.043 254.335,192.031 254.4,192.023 259.498,192.023 259.498,173.327 247.829,173.327 245.752,175.404 245.752,190.421 248.054,192.723 253.596,192.723
NetC60_1 on GND Plane (split plane): 259.498,153.552 247.252,153.552 247.252,154.825 247.252,157.546 249.678,159.972 249.688,159.984 249.718,160.024 249.729,160.049 249.744,160.085 249.751,160.141 249.752,160.15 249.752,164.65 249.744,164.715 249.726,164.758 249.718,164.776 249.701,164.799 249.678,164.828 247.252,167.254 247.252,169.046 248.679,170.473 259.498,170.473
+3.3 on PWR Plane (split plane): 259.498,114.502 116.502,114.502 116.502,175.073 152.925,175.073 152.99,175.081 153.051,175.107 153.103,175.147 153.143,175.199 153.169,175.26 153.177,175.325 153.177,188.25 153.169,188.315 153.143,188.376 153.103,188.428 153.051,188.468 152.99,188.494 152.925,188.502 142.477,188.502 142.477,199.498 259.498,199.498
+5 on PWR Plane (split plane): 141.973,188.25 141.981,188.185 142.007,188.124 142.047,188.072 142.099,188.032 142.16,188.006 142.225,187.998 152.673,187.998 152.673,175.577 116.502,175.577 116.502,199.498 141.973,199.498

## Keep-outs
Keep-Out Layer:
  lines w0.2: 116.5,114.5 259.5,114.5 259.5,199.5 116.5,199.5 116.5,114.5

## Other copper
Top Layer:
  region net +5: 142.325,186.3 137.025,186.3 137.025,182.7 142.325,182.7
  region net +5: 142.325,182.825 141.025,182.825 141.025,180.9 142.325,180.9
  region net GND: 147.425,187.25 142.725,187.25 142.725,182.7 147.425,182.7
  region net GND: 142.037,180.55 138.7,180.55 138.7,179.95 142.037,179.95
  region net GND: 140.85,182.5 137.025,182.5 137.025,178.45 140.85,178.45
  region net +3.3: 152.35,197.025 147.825,197.025 147.825,182.7 152.35,182.7
  region net +3.3: 152.35,185.425 150.8,185.425 150.8,178.8 152.35,178.8
  region net +3.3: 150.079,183.654 149.425,183 151.025,181.4 151.679,182.054
  region net GND: 137.65,180.175 133.425,180.175 133.425,178.45 137.65,178.45
  region net +3.3: 136.55,185.675 133.425,185.675 133.425,184.45 136.55,184.45
  region net GND: 147.425,199.025 142.725,199.025 142.725,186.7 147.425,186.7
  region net NetC5_2: 134.225,182.8 132.075,182.8 132.075,181.925 134.225,181.925
  region net NetC5_2: 136.55,183.85 133.425,183.85 133.425,180.75 136.55,180.75
  rectangle net NetP1_2: 126.2,193.025 126.9,197.875
  rectangle net NetP1_2: 127.15,193.025 127.85,197.875
  rectangle net NetL1_1: 128.1,196.775 130.75,197.875
  region net NetL2_1: 143.625,181.5 143.625,180.425 145.425,180.425 147.05,178.8 149,178.8 149,181.5
  region net GND: 141.175,180.55 142.45,180.55 142.725,180.825 142.725,182.7 143.675,182.7 143.225,182.25 143.225,180.275 142.9,179.95 141.175,179.95
GND Plane (plane layer: these items are gaps in the copper):
  lines w0.2: 260,157 260,174.075 ; 247.025,153.3 247.025,153.3
  lines w0.5: 116,175.325 152.925,175.325 152.925,188.25 142.225,188.25 142.225,200.025 ; 139.727,114.102 139.727,129.027 141.375,130.675 145.525,130.675 147.227,128.973 147.227,122.602 149.727,120.102 162.227,120.102 164.727,122.602 164.727,126.777 166.5,128.55 169.875,128.55 171.727,126.698 171.727,114.102 ; 175.7,114.1 175.7,129.15 177.425,130.875 181.1,130.875 183.2,128.775 183.2,122.6 185.7,120.1 198.2,120.1 200.7,122.6 200.7,126.625 202.55,128.475 205.875,128.475 207.7,126.65 207.7,114.1 ; 211.625,114.075 211.625,126.375 213.675,128.425 216.525,128.425 219.35,125.6 219.35,122.525 222.425,119.45 233.225,119.45 236.125,122.35 236.125,128.325 238.375,130.575 242,130.575 243.675,128.9 243.675,114.075 ; 247,153.325 247,154.825 247,157.65 249.5,160.15 249.5,164.65 247,167.15 247,169.15 248.575,170.725 259.925,170.725 ; 260,121.6 247.75,121.6 245.95,123.4 245.95,126.65 248.1,128.8 252.5,128.8 255.5,131.8 255.5,142.8 252.5,145.8 246.05,145.8 245.075,145.8 243.5,147.375 243.5,151.925 244.875,153.3 260,153.3 ; 260,173.075 248.575,173.075 247.725,173.075 245.5,175.3 245.5,190.525 247.95,192.975 253.7,192.975 254.4,192.275 260,192.275
PWR Plane (plane layer: these items are gaps in the copper):
  lines w0.5: 116,175.325 152.925,175.325 152.925,188.25 142.225,188.25 142.225,200.025

## Silkscreen, mask and mechanical layers (free items; w line width, h text height)
Top Overlay:
  drawing of 3512 lines, arcs and shapes, not listed
  text "GND" at 146.262,191.475 h1 r90
  text "+5V" at 148.275,191.475 h1 r90
  text "N/A" at 150.287,191.475 h1 r90
  text "USR1" at 177.75,184.1 h1.5
  text "USR2" at 186.475,184.1 h1.5
  text "USR1" at 166.084,182.444 h1.5 r90
  text "USR2" at 169.087,181.944 h1.5 r90
  text "USR3" at 172.09,181.944 h1.5 r90
  text "USR4" at 175.093,181.944 h1.5 r90
  text "E_STOP" at 163.081,178.945 h1.5 r90
  text "PWR_GOOD" at 157.075,175.946 h1.5 r90
  text "WATCHDOG" at 160.078,175.946 h1.5 r90
  text "ETHERNET" at 231.775,175.35 h2 r90
  text "VERSION 1.1.2" at 212.575,169.7 h1.5
  text "S/N" at 208.875,165.9 h1.5
  text "86" at 168.019,164.461 h1
  text "Note" at 207.875,162.9 h1.5
  text "MICRO SD" at 142.475,158.275 h2 r90
  text "JTAG" at 146.325,157.325 h2 r90
  text "USB" at 240.75,156.525 h2 r90
  text "144" at 163.5,155.25 h1 r90
  text "(mm)" at 171.5,155.25 h1 r90
  text "136" at 175.5,155.25 h1 r90
  text "SD ACT" at 117.125,153.45 h1.5
  text "M4" at 167,153.45 h1 r90
  text "LINK GOOD" at 234.725,152.375 h1
  text "DIMENSIONS" at 169.5,152.25 h1 r90
  text "78" at 168.019,147.961 h1
  text "2011" at 138.586,143.067 h1.5 r90
  text "GND" at 161.933,142.025 h1
  text "RESET" at 119.075,140.375 h1.5 r90
  text "1 GND" at 238.4,139.875 h1
  text "RXD" at 161.933,139.6 h1
  text "©" at 138.874,139.292 h3.2 r90
  text "2 CAN_P" at 238.25,138.4 h1
  text "6 CAN_N" at 238.225,136.925 h1
  text "TXD" at 161.933,136.875 h1
  text "(TTL)" at 161.2,136.075 h1 r90
  text "UART0" at 159.675,135.85 h1 r90
  text "7 GND" at 238.25,135.45 h1
  text "CAN" at 237.2,134.65 h2 r90
  text "James Buckley" at 135.874,134.617 h1.5 r90
  text "+3.3V" at 160.1,134.35 h1
  text "9 GND" at 238.25,134 h1
  text "UART2 (TTL)" at 185.875,133.675 h1 r90
  text "UART0 (ISP)" at 148.475,129.65 h2
  text "UART2" at 186.95,129.65 h2
  text "UART1 (FULL)" at 213.8,129.65 h2
  text "ISP EN" at 119.1,128.875 h1.5 r90
  text "(5V) I2C" at 123.75,128.625 h2
  text "+5V" at 127.55,124.675 h1 r90
  text "SCL" at 130.025,124.675 h1 r90
  text "SDA" at 132.5,124.675 h1 r90
  text "GND" at 134.975,124.675 h1 r90

## Text inside footprints (layer, text, board x,y; h text height)
CONN2: Top Overlay "ACT." at 254.125,175.25 h1.5; Top Overlay "LINK" at 253.95,188.8 h1.5; Top Overlay "ENET RJ45" at 241.6,176.2 h1.5 r90; Top Overlay "10/100 Mbit" at 244.325,175.375 h1.5 r90
J1: Top Overlay "DE9 Male" at 150.3,115.8 h1.5; Top Overlay "9" at 159.575,120.975 h1; Top Overlay "6" at 151.15,121 h1; Top Overlay "1" at 147.6,126.05 h1; Top Overlay "5" at 163.45,126.05 h1
J2: Top Overlay "5" at 199.45,126.05 h1; Top Overlay "1" at 183.6,126.05 h1; Top Overlay "6" at 187.15,121 h1; Top Overlay "9" at 195.575,120.975 h1; Top Overlay "DE9 Male" at 186.3,115.8 h1.5
J3: Top Overlay "DE9 Male" at 222.225,115.8 h1.5; Top Overlay "9" at 231.5,120.975 h1; Top Overlay "6" at 223.075,121 h1; Top Overlay "1" at 219.525,126.05 h1; Top Overlay "5" at 235.375,126.05 h1
J4: Top Overlay "USB 2.0" at 253.525,157.45 h1.5 r90
J5: Top Overlay "5" at 247.95,145.2 h1 r90; Top Overlay "1" at 247.95,129.35 h1 r90; Top Overlay "6" at 253,132.9 h1 r90; Top Overlay "9" at 253.025,141.325 h1 r90; Top Overlay "DE9 Male" at 258.2,132.05 h1.5 r90
P3: Top Overlay "JST-XH" at 126.55,117.1 h1.5
P4: Top Overlay "20" at 151.11,168.475 h1 r90; Top Overlay "19" at 162.51,168.575 h1 r90; Top Overlay "1" at 162.51,146.375 h1 r90; Top Overlay "2" at 151.11,146.075 h1 r90